# EAGLE board led (EAGLE 9.6.2)
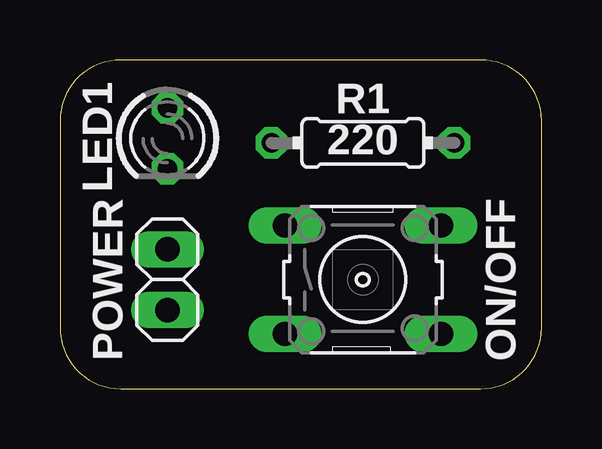
[diagram p0: board, top side]
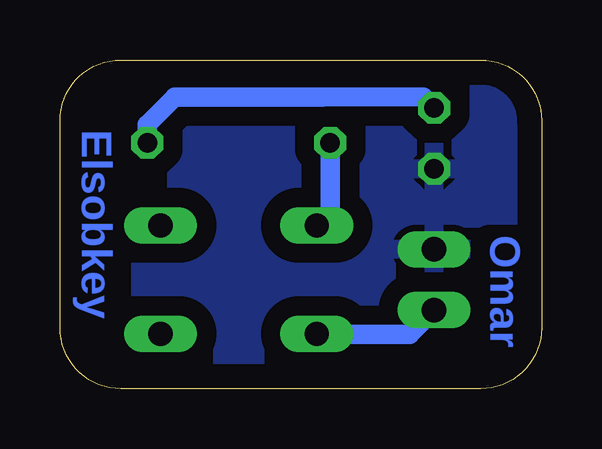
[diagram p1: board, bottom side, seen from below]

Size 20.07 x 13.72 mm. Coordinates in mm from the lower left corner, seen from the top.
Outline: 17.53,13.72 2.54,13.72 arc90 0,11.18 0,2.54 arc90 2.54,0 17.53,0 arc90 20.07,2.54 20.07,11.18 arc90 17.53,13.72
Copper layers (1*16): Top 0.035mm / dielectric 1.5mm / Bottom 0.035mm
Design rules "default *": minimum track width 0.8mm, minimum drill 0.7mm, track to track 0.6mm, track to pad 0.6mm, pad to pad 0.6mm, via to via 0.6mm, smd to smd 0.6mm, copper to edge 40mil, drill to drill 6mil, minimum pad ring 10mil, minimum via ring 8mil, stop-mask expansion 4mil, vias tented up to drill 0mil, thermal gap 10mil

## Footprints (pad centres in the part's own frame; a part is rotated, then mirrored left to right if it is on the bottom)
LED3MM = drill 0.813 octagon: A -1.27,0; K 1.27,0
B3F-10XX = drill 1.016 long: 1 -3.251,2.261; 2 3.251,2.261; 3 -3.251,-2.261; 4 3.251,-2.261
1X02 = drill 1.016 long: 1 -1.27,0; 2 1.27,0
0204/7 = drill 0.813 octagon: 1 -3.81,0; 2 3.81,0

## Placement (x,y rotation side)
LED1  [LED3MM]  4.48,10.44 270 top
ON/OFF  [B3F-10XX]  12.62,4.55 0 top
POWER  [1X02]  4.48,4.55 270 top
R1  220  [0204/7]  12.62,10.26 0 top

## Library data of the parts
LED1 = led
ON/OFF = switch-omron; MPN: B3F-1000; OC_FARNELL: 176432; OC_NEWARK: 36M3542
POWER = pinhead
R1 = rcl; SPICEPREFIX: R

## Nets
+5V: ON/OFF.3 POWER.2
GND: LED1.K POWER.1
N$1: ON/OFF.1 R1.1
N$2: LED1.A R1.2

## Tracks (layer width: path | path; a pad name or v marks a point on that pad's centre or on a via)
+5V
  Bottom 0.813: POWER.2 5.49,2.26 9.34,2.26 ON/OFF.3
GND
  pour Bottom (isolate 0.8): -2.54,14.48 20.83,14.48 20.83,-1.02 -2.54,-1.02
N$1
  Bottom 0.813: R1.1 8.81,7.37 ON/OFF.1
N$2
  Bottom 0.8: LED1.A 4.93,12.16 9.14,12.16
  Bottom 0.813: R1.2 16.43,11.02 15.28,12.16 9.14,12.16

## Text on the board
Bottom: Elsobkey | Omar